# Altium PCB FPv1.3.2.PcbDoc (part 9 of 9)
Units mm, origin at the board's own origin, x right, y up, seen from the top; angles counter-clockwise.
Board outline 81.28 x 53.34 mm, 4 copper layers (Top Layer, GROUND PLANE, POWER PLANE, Bottom Layer); 98 components, 183 nets, 614 pads, 312 vias.
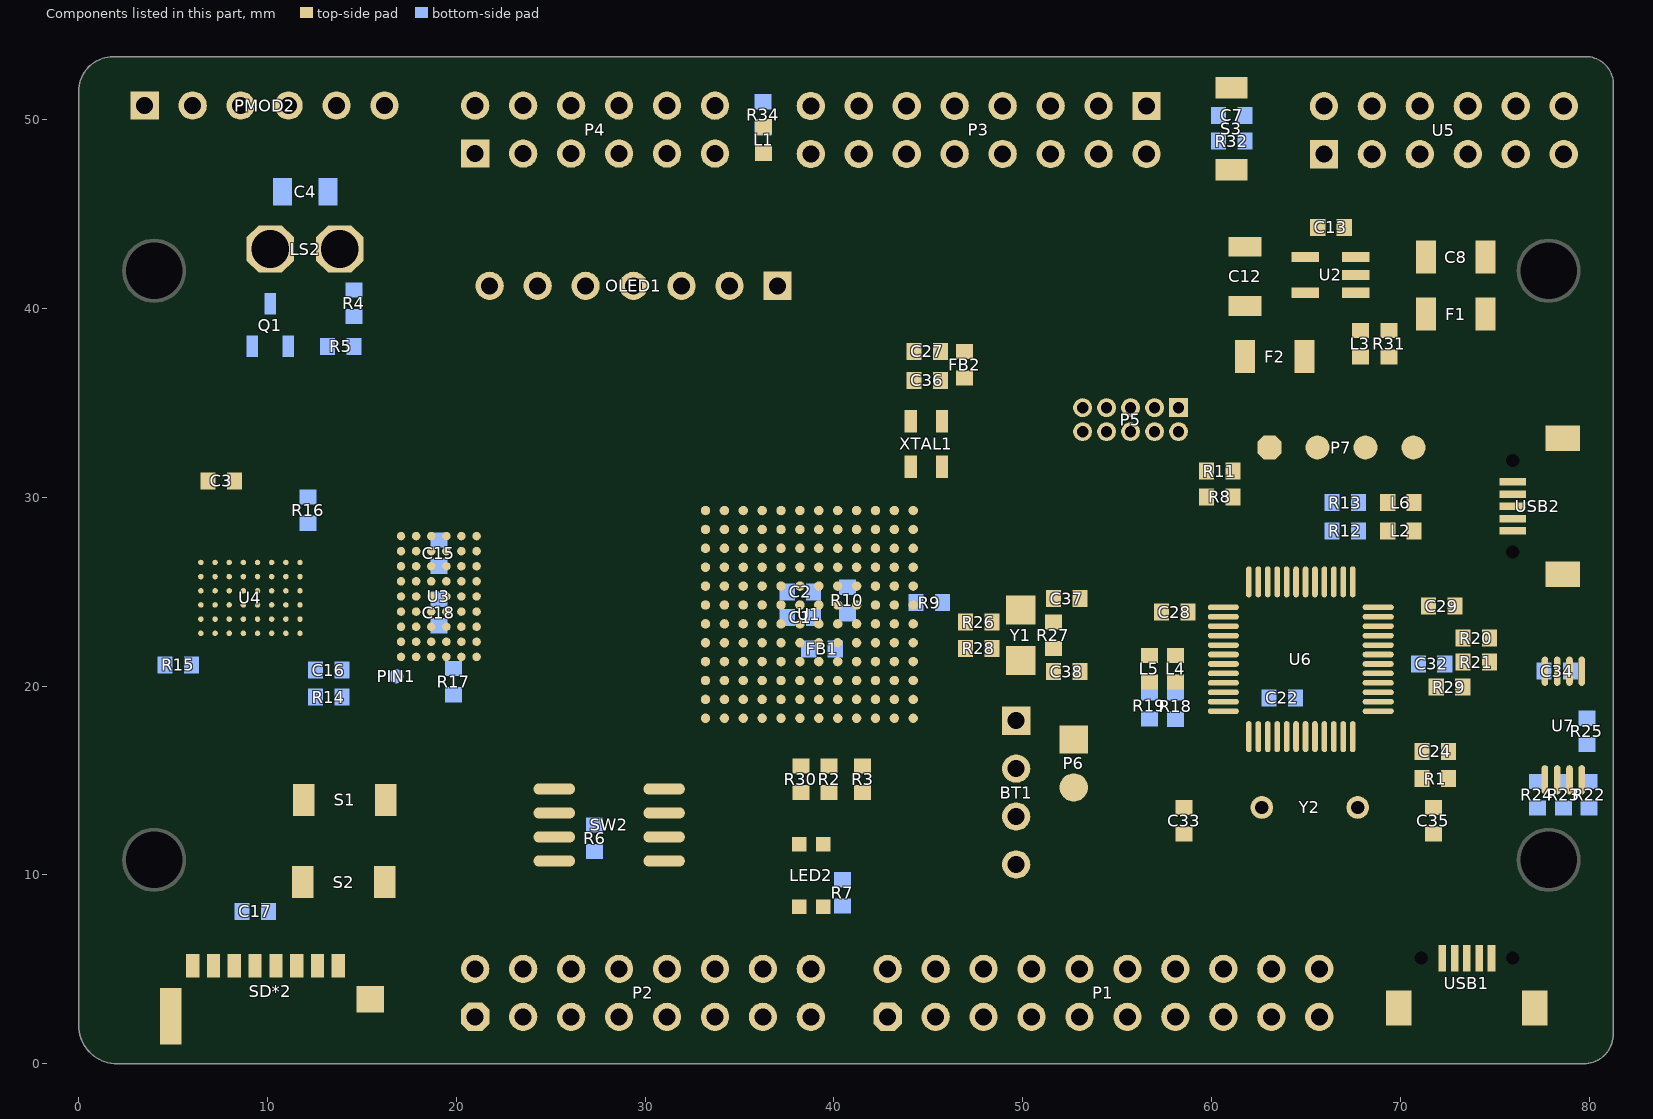
[diagram p11: the components of this part, seen from the top]

## Via types
v1: diameter 0.403, hole 0.2, Top Layer to Bottom Layer, tented both sides, 261 vias
v2: diameter 0.503, hole 0.3, Top Layer to Bottom Layer, tented both sides, 25 vias
v3: diameter 0.6, hole 0.4, Top Layer to Bottom Layer, tented both sides, 11 vias
v4: diameter 0.508, hole 0.33, Top Layer to Bottom Layer, tented both sides, 5 vias
v5: diameter 0.703, hole 0.4, Top Layer to Bottom Layer, tented both sides, 3 vias
v6: diameter 0.603, hole 0.4, Top Layer to Bottom Layer, tented both sides, 2 vias
v7: diameter 0.503, hole 0.25, Top Layer to Bottom Layer, tented both sides, 2 vias
v8: diameter 0.6, hole 0.24, Top Layer to Bottom Layer, tented both sides, 1 vias
v9: diameter 0.508, hole 0.349, Top Layer to Bottom Layer, tented both sides, 1 vias
v10: diameter 0.603, hole 0.3, Top Layer to Bottom Layer, tented both sides, 1 vias

## Nets (pads, with @x,y where several pads share a name; then routed paths per layer and width w, separated by ;. In a path a pad name is that pad's centre, name@x,y a point inside that pad or via, vN(x,y) a via of type N, cw(c..) or ccw(c..) an arc to the next point about the centre after c; other vN are vias at no path point) (continued)
copper on no net: (continued)
  Top Layer w0.025: 57.963,38.405 58.496,38.405 ; 57.963,38.43 58.522,38.43 ; 57.963,43.51 57.988,43.51 ; 57.963,43.637 58.09,43.637 ; 57.988,36.754 58.115,36.754 ; 57.988,37.516 58.09,37.516 ; 57.988,38.456 58.09,38.456 ; 57.988,43.205 58.064,43.205 ; 58.014,38.481 58.064,38.481 ; 58.014,43.612 58.115,43.612 ; 58.039,36.779 58.141,36.779 ; 58.039,37.541 58.166,37.541 ; 58.064,37.567 58.166,37.567 ; 58.064,43.586 58.166,43.586 ; 58.09,36.805 58.191,36.805 ; 58.115,37.516 58.191,37.516 ; 58.115,37.592 58.191,37.592 ; 58.115,38.456 58.547,38.456 ; 58.115,43.561 58.217,43.561 ; 58.141,36.83 58.242,36.83 ; 58.141,37.465 58.217,37.465 ; 58.141,37.49 58.191,37.49 ; 58.141,37.617 58.242,37.617 ; 58.141,38.481 58.572,38.481 ; 58.166,37.44 58.242,37.44 ; 58.166,37.643 58.268,37.643 ; 58.166,38.506 58.572,38.506 ; 58.166,38.532 58.598,38.532 ; 58.166,43.536 58.268,43.536 ; 58.191,36.855 58.268,36.855 ; 58.191,37.389 58.268,37.389 ; 58.191,37.414 58.242,37.414 ; 58.191,38.557 58.623,38.557 ; 58.191,38.583 58.623,38.583 ; 58.191,43.51 58.293,43.51 ; 58.217,36.881 58.318,36.881 ; 58.217,37.363 58.293,37.363 ; 58.217,37.668 58.268,37.668 ; 58.217,38.608 58.649,38.608 ; 58.217,38.633 58.674,38.633 ; 58.242,37.313 58.318,37.313 ; 58.242,37.338 58.293,37.338 ; 58.242,38.659 58.674,38.659 ; 58.242,38.684 58.699,38.684 ; 58.242,43.485 58.344,43.485 ; 58.268,36.906 58.369,36.906 ; 58.268,37.287 58.344,37.287 ; 58.268,38.71 58.369,38.71 ; 58.268,38.735 58.369,38.735 ; 58.293,37.236 58.369,37.236 ; 58.293,37.262 58.344,37.262 ; 58.293,37.744 58.395,37.744 ; 58.293,38.76 58.395,38.76 ; 58.293,38.786 58.395,38.786 ; 58.293,43.459 58.369,43.459 ; 58.318,36.932 58.395,36.932 ; 58.318,37.211 58.369,37.211 ; 58.318,37.719 58.395,37.719 ; 58.318,37.77 58.395,37.77 ; 58.318,38.811 58.395,38.811 ; 58.318,38.837 58.395,38.837 ; 58.318,38.862 58.395,38.862 ; 58.318,42.291 58.496,42.291 ; 58.318,42.316 58.369,42.316 ; 58.318,42.342 58.344,42.342 ; 58.318,43.434 58.42,43.434 ; 58.344,36.957 58.445,36.957 ; 58.344,37.694 58.42,37.694 ; 58.344,37.795 58.42,37.795 ; 58.344,38.887 58.395,38.887 ; 58.344,38.913 58.395,38.913 ; 58.344,42.215 58.395,42.215 ; 58.344,42.24 58.445,42.24 ; 58.344,42.266 58.471,42.266 ; 58.344,42.545 58.471,42.545 ; 58.344,42.57 58.445,42.57 ; 58.369,37.668 58.445,37.668 ; 58.369,38.938 58.395,38.938 ; 58.369,38.964 58.395,38.964 ; 58.369,38.989 58.395,38.989 ; 58.369,42.494 58.572,42.494 ; 58.369,42.52 58.522,42.52 ; 58.369,42.596 58.395,42.596 ; 58.369,43.409 58.445,43.409 ; 58.395,36.982 58.471,36.982 ; 58.395,37.643 58.471,37.643 ; 58.395,37.821 58.471,37.821 ; 58.395,43.383 58.496,43.383 ; 58.42,37.008 58.522,37.008 ; 58.42,37.617 58.522,37.617 ; 58.42,37.846 58.496,37.846 ; 58.42,38.71 58.725,38.71 ; 58.445,37.592 58.522,37.592 ; 58.445,37.871 58.522,37.871 ; 58.445,38.735 58.725,38.735 ; 58.445,42.316 58.547,42.316 ; 58.445,42.469 58.623,42.469 ; 58.445,43.358 58.522,43.358 ; 58.471,37.033 58.547,37.033 ; 58.471,37.567 58.547,37.567 ; 58.471,37.897 58.547,37.897 ; 58.471,38.76 58.75,38.76 ; 58.471,38.786 58.75,38.786 ; 58.471,43.332 58.572,43.332 ; 58.496,37.059 58.572,37.059 ; 58.496,37.516 58.572,37.516 ; 58.496,37.541 58.572,37.541 ; 58.496,37.643 58.572,37.643 ; 58.496,37.922 58.572,37.922 ; 58.496,38.811 58.776,38.811 ; 58.496,41.3 58.903,41.3 ; 58.496,42.342 58.598,42.342 ; 58.522,37.084 58.623,37.084 ; 58.522,37.49 58.598,37.49 ; 58.522,37.668 58.598,37.668 ; 58.522,37.948 58.572,37.948 ; 58.522,38.837 58.776,38.837 ; 58.522,43.307 58.598,43.307 ; 58.547,37.465 58.699,37.465 ; 58.547,37.694 58.623,37.694 ; 58.547,38.862 58.801,38.862 ; 58.547,38.887 58.801,38.887 ; 58.547,42.367 58.623,42.367 ; 58.547,42.443 58.649,42.443 ; 58.547,43.282 58.623,43.282 ; 58.572,37.109 58.649,37.109 ; 58.572,37.44 58.649,37.44 ; 58.572,37.719 58.649,37.719 ; 58.572,38.913 58.826,38.913 ; 58.572,41.275 58.903,41.275 ; 58.572,42.393 58.776,42.393 ; 58.572,43.256 58.674,43.256 ; 58.598,37.135 58.674,37.135 ; 58.598,37.414 58.623,37.414 ; 58.598,37.744 58.674,37.744 ; 58.598,38.938 58.826,38.938 ; 58.598,38.964 58.852,38.964 ; 58.598,42.418 58.877,42.418 ; 58.623,37.16 58.699,37.16 ; 58.623,37.77 58.699,37.77 ; 58.623,38.989 58.852,38.989 ; 58.623,41.25 58.928,41.25 ; 58.623,43.231 58.699,43.231 ; 58.649,37.49 58.725,37.49 ; 58.649,37.795 58.674,37.795 ; 58.649,37.973 58.725,37.973 ; 58.649,37.998 58.699,37.998 ; 58.649,38.024 58.699,38.024 ; 58.649,38.049 58.699,38.049 ; 58.649,38.075 58.699,38.075 ; 58.649,38.1 58.699,38.1 ; 58.649,38.125 58.725,38.125 ; 58.649,39.014 58.877,39.014 ; 58.649,39.04 58.877,39.04 ; 58.649,42.316 58.75,42.316 ; 58.649,42.545 58.725,42.545 ; 58.649,42.57 58.674,42.57 ; 58.649,43.205 58.725,43.205 ; 58.674,37.186 58.75,37.186 ; 58.674,37.516 58.75,37.516 ; 58.674,37.922 58.75,37.922 ; 58.674,37.948 58.725,37.948 ; 58.674,38.151 58.725,38.151 ; 58.674,39.065 58.903,39.065 ; 58.674,39.091 58.903,39.091 ; 58.674,41.224 58.928,41.224 ; 58.674,42.291 58.75,42.291 ; 58.674,42.342 58.75,42.342 ; 58.674,42.52 58.776,42.52 ; 58.674,43.18 58.75,43.18 ; 58.699,37.211 58.776,37.211 ; 58.699,37.541 58.776,37.541 ; 58.699,37.897 58.776,37.897 ; 58.699,38.176 58.75,38.176 ; 58.699,39.116 58.928,39.116 ; 58.699,39.141 58.928,39.141 ; 58.699,41.199 58.928,41.199 ; 58.699,42.367 58.75,42.367 ; 58.699,42.647 58.725,42.647 ; 58.699,43.155 58.776,43.155 ; 58.725,37.236 58.801,37.236 ; 58.725,37.567 58.801,37.567 ; 58.725,37.871 58.801,37.871 ; 58.725,38.202 58.801,38.202 ; 58.725,39.167 58.928,39.167 ; 58.725,39.192 58.953,39.192 ; 58.725,41.173 58.953,41.173 ; 58.725,42.672 58.877,42.672 ; 58.725,42.697 58.877,42.697 ; 58.75,37.262 58.826,37.262 ; 58.75,37.592 58.826,37.592 ; 58.75,37.846 58.852,37.846 ; 58.75,38.227 58.928,38.227 ; 58.75,39.218 58.953,39.218 ; 58.75,39.243 58.953,39.243 ; 58.75,39.268 58.979,39.268 ; 58.75,41.148 58.953,41.148 ; 58.75,42.494 58.801,42.494 ; 58.75,42.596 58.801,42.596 ; 58.75,42.647 58.852,42.647 ; 58.75,42.723 58.903,42.723 ; 58.75,42.748 58.826,42.748 ; 58.75,43.129 58.826,43.129 ; 58.776,37.287 58.852,37.287 ; 58.776,37.617 58.852,37.617 ; 58.776,37.821 59.004,37.821 ; 58.776,39.294 58.979,39.294 ; 58.776,39.319 58.979,39.319 ; 58.776,41.123 58.953,41.123 ; 58.776,42.443 58.903,42.443 ; 58.776,42.469 58.852,42.469 ; 58.776,42.621 58.801,42.621 ; 58.776,42.774 58.852,42.774 ; 58.776,43.104 58.852,43.104 ; 58.801,37.643 58.852,37.643 ; 58.801,38.252 58.877,38.252 ; 58.801,39.345 59.004,39.345 ; 58.801,39.37 59.004,39.37 ; 58.801,39.395 59.004,39.395 ; 58.801,41.097 58.979,41.097 ; 58.801,42.393 58.877,42.393 ; 58.801,42.799 58.852,42.799 ; 58.801,43.078 58.877,43.078 ; 58.826,37.313 58.903,37.313 ; 58.826,39.421 59.03,39.421 ; 58.826,39.446 59.03,39.446 ; 58.826,39.472 59.03,39.472 ; 58.826,41.072 58.979,41.072 ; 58.826,42.545 58.877,42.545 ; 58.826,42.57 58.877,42.57 ; 58.826,43.053 58.903,43.053 ; 58.852,37.338 58.928,37.338 ; 58.852,37.795 58.953,37.795 ; 58.852,38.202 58.928,38.202 ; 58.852,39.497 59.03,39.497 ; 58.852,39.522 59.055,39.522 ; 58.852,39.548 59.055,39.548 ; 58.852,41.021 59.004,41.021 ; 58.852,41.046 59.004,41.046 ; 58.852,42.52 58.903,42.52 ; 58.852,42.596 59.055,42.596 ; 58.852,43.028 58.928,43.028 ; 58.877,37.363 58.953,37.363 ; 58.877,39.573 59.055,39.573 ; 58.877,39.599 59.055,39.599 ; 58.877,39.624 59.08,39.624 ; 58.877,39.649 59.08,39.649 ; 58.877,40.97 59.004,40.97 ; 58.877,40.996 59.004,40.996 ; 58.877,42.621 59.08,42.621 ; 58.877,42.748 58.903,42.748 ; 58.877,42.774 58.928,42.774 ; 58.877,43.002 58.953,43.002 ; 58.903,37.389 58.979,37.389 ; 58.903,38.354 59.004,38.354 ; 58.903,38.379 58.953,38.379 ; 58.903,39.675 59.08,39.675 ; 58.903,39.7 59.08,39.7 ; 58.903,39.726 59.08,39.726 ; 58.903,39.751 59.08,39.751 ; 58.903,40.894 59.03,40.894 ; 58.903,40.919 59.03,40.919 ; 58.903,40.945 59.03,40.945 ; 58.903,42.545 58.953,42.545 ; 58.903,42.647 59.106,42.647 ; 58.903,42.672 59.106,42.672 ; 58.903,42.799 58.928,42.799 ; 58.903,42.824 58.928,42.824 ; 58.903,42.85 58.928,42.85 ; 58.903,42.977 58.979,42.977 ; 58.928,37.414 59.004,37.414 ; 58.928,38.329 59.055,38.329 ; 58.928,39.776 59.106,39.776 ; 58.928,39.802 59.106,39.802 ; 58.928,39.827 59.106,39.827 ; 58.928,39.853 59.106,39.853 ; 58.928,39.878 59.106,39.878 ; 58.928,39.903 59.106,39.903 ; 58.928,40.818 59.055,40.818 ; 58.928,40.843 59.055,40.843 ; 58.928,40.869 59.055,40.869 ; 58.928,42.57 59.055,42.57 ; 58.928,42.951 59.004,42.951 ; 58.953,37.44 59.03,37.44 ; 58.953,37.846 59.03,37.846 ; 58.953,39.929 59.106,39.929 ; 58.953,39.954 59.106,39.954 ; 58.953,39.98 59.106,39.98 ; 58.953,40.005 59.106,40.005 ; 58.953,40.03 59.131,40.03 ; 58.953,40.056 59.131,40.056 ; 58.953,40.081 59.131,40.081 ; 58.953,40.107 59.131,40.107 ; 58.953,40.691 59.08,40.691 ; 58.953,40.716 59.08,40.716 ; 58.953,40.742 59.08,40.742 ; 58.953,40.767 59.055,40.767 ; 58.953,40.792 59.055,40.792 ; 58.953,42.443 59.131,42.443 ; 58.953,42.469 59.157,42.469 ; 58.953,42.697 59.004,42.697 ; 58.953,42.723 59.004,42.723 ; 58.953,42.748 59.004,42.748 ; 58.953,42.926 59.03,42.926 ; 58.979,37.465 59.055,37.465 ; 58.979,38.303 59.157,38.303 ; 58.979,40.132 59.131,40.132 ; 58.979,40.157 59.131,40.157 ; 58.979,40.183 59.131,40.183 ; 58.979,40.208 59.131,40.208 ; 58.979,40.234 59.131,40.234 ; 58.979,40.259 59.131,40.259 ; 58.979,40.284 59.131,40.284 ; 58.979,40.31 59.131,40.31 ; 58.979,40.335 59.131,40.335 ; 58.979,40.361 59.106,40.361 ; 58.979,40.386 59.106,40.386 ; 58.979,40.411 59.106,40.411 ; 58.979,40.437 59.106,40.437 ; 58.979,40.462 59.106,40.462 ; 58.979,40.488 59.106,40.488 ; 58.979,40.513 59.106,40.513 ; 58.979,40.538 59.106,40.538 ; 58.979,40.564 59.106,40.564 ; 58.979,40.589 59.106,40.589 ; 58.979,40.615 59.08,40.615 ; 58.979,40.64 59.08,40.64 ; 58.979,40.665 59.08,40.665 ; 58.979,42.901 59.055,42.901 ; 59.004,37.49 59.08,37.49 ; 59.004,37.871 59.055,37.871 ; 59.004,42.875 59.08,42.875 ; 59.03,37.516 59.106,37.516 ; 59.03,37.897 59.08,37.897 ; 59.03,37.922 59.106,37.922 ; 59.03,38.049 59.106,38.049 ; 59.03,38.278 59.157,38.278 ; 59.03,42.418 59.106,42.418 ; 59.03,42.494 59.157,42.494 ; 59.03,42.85 59.106,42.85 ; 59.055,37.541 59.131,37.541 ; 59.055,37.948 59.106,37.948 ; 59.055,37.973 59.106,37.973 ; 59.055,37.998 59.106,37.998 ; 59.055,38.024 59.106,38.024 ; 59.055,38.075 59.08,38.075 ; 59.055,38.633 59.131,38.633 ; 59.055,42.52 59.157,42.52 ; 59.055,42.545 59.131,42.545 ; 59.055,42.824 59.131,42.824 ; 59.08,37.567 59.131,37.567 ; 59.08,38.252 59.182,38.252 ; 59.08,38.608 59.182,38.608 ; 59.08,38.659 59.106,38.659 ; 59.08,42.799 59.157,42.799 ; 59.106,37.592 59.157,37.592 ; 59.106,38.227 59.233,38.227 ; 59.106,38.329 59.157,38.329 ; 59.106,38.583 59.233,38.583 ; 59.106,42.774 59.182,42.774 ; 59.131,37.617 59.182,37.617 ; 59.131,37.643 59.207,37.643 ; 59.131,38.354 59.182,38.354 ; 59.131,38.379 59.182,38.379 ; 59.131,42.748 59.207,42.748 ; 59.157,37.668 59.233,37.668 ; 59.157,38.202 59.284,38.202 ; 59.157,38.405 59.207,38.405 ; 59.157,38.43 59.233,38.43 ; 59.157,38.557 59.284,38.557 ; 59.157,38.811 59.284,38.811 ; 59.157,38.837 59.284,38.837 ; 59.157,38.862 59.512,38.862 ; 59.157,42.723 59.207,42.723 ; 59.182,37.694 59.258,37.694 ; 59.182,38.456 59.233,38.456 ; 59.182,38.481 59.258,38.481 ; 59.182,42.697 59.233,42.697 ; 59.207,37.719 59.284,37.719 ; 59.207,38.176 59.334,38.176 ; 59.207,38.506 59.36,38.506 ; 59.207,38.532 59.309,38.532 ; 59.207,38.786 59.334,38.786 ; 59.207,42.647 59.284,42.647 ; 59.207,42.672 59.258,42.672 ; 59.233,37.744 59.284,37.744 ; 59.233,42.621 59.309,42.621 ; 59.258,37.77 59.309,37.77 ; 59.258,37.795 59.334,37.795 ; 59.258,38.151 59.334,38.151 ; 59.258,38.76 59.385,38.76 ; 59.258,38.887 59.69,38.887 ; 59.258,42.596 59.334,42.596 ; 59.284,37.821 59.36,37.821 ; 59.284,38.481 59.411,38.481 ; 59.284,39.116 59.385,39.116 ; 59.284,42.57 59.334,42.57 ; 59.309,37.846 59.385,37.846 ; 59.309,38.735 59.436,38.735 ; 59.309,39.091 59.436,39.091 ; 59.309,39.141 59.334,39.141 ; 59.309,41.224 59.385,41.224 ; 59.309,41.25 59.334,41.25 ; 59.309,42.52 59.385,42.52 ; 59.309,42.545 59.36,42.545 ; 59.334,37.871 59.385,37.871 ; 59.334,37.897 59.411,37.897 ; 59.334,38.456 59.461,38.456 ; 59.334,40.869 59.36,40.869 ; 59.334,40.894 59.385,40.894 ; 59.334,40.919 59.436,40.919 ; 59.334,41.199 59.411,41.199 ; 59.334,42.494 59.411,42.494 ; 59.36,37.922 59.436,37.922 ; 59.36,38.71 59.487,38.71 ; 59.36,39.065 59.461,39.065 ; 59.36,39.319 59.411,39.319 ; 59.36,39.345 59.411,39.345 ; 59.36,40.945 59.461,40.945 ; 59.36,41.173 59.461,41.173 ; 59.36,42.469 59.411,42.469 ; 59.385,37.948 59.436,37.948 ; 59.385,38.43 59.487,38.43 ; 59.385,39.218 59.461,39.218 ; 59.385,39.243 59.436,39.243 ; 59.385,39.268 59.436,39.268 ; 59.385,39.294 59.411,39.294 ; 59.385,39.37 59.436,39.37 ; 59.385,39.395 59.436,39.395 ; 59.385,39.421 59.436,39.421 ; 59.385,40.564 59.436,40.564 ; 59.385,40.589 59.436,40.589 ; 59.385,40.615 59.436,40.615 ; 59.385,40.64 59.436,40.64 ; 59.385,40.665 59.436,40.665 ; 59.385,40.691 59.436,40.691 ; 59.385,40.716 59.436,40.716 ; 59.385,42.418 59.461,42.418 ; 59.385,42.443 59.436,42.443 ; 59.411,37.973 59.461,37.973 ; 59.411,37.998 59.487,37.998 ; 59.411,38.684 59.512,38.684 ; 59.411,39.04 59.512,39.04 ; 59.411,39.192 59.487,39.192 ; 59.411,39.446 59.461,39.446 ; 59.411,39.472 59.512,39.472 ; 59.411,39.649 59.868,39.649 ; 59.411,39.675 59.766,39.675 ; 59.411,40.513 59.487,40.513 ; 59.411,40.538 59.461,40.538 ; 59.411,40.742 59.461,40.742 ; 59.411,40.767 59.487,40.767 ; 59.411,40.97 59.512,40.97 ; 59.411,41.148 59.487,41.148 ; 59.411,42.393 59.461,42.393 ; 59.436,38.024 59.512,38.024 ; 59.436,38.405 59.461,38.405 ; 59.436,39.167 59.563,39.167 ; 59.436,39.497 59.766,39.497 ; 59.436,40.107 59.487,40.107 ; 59.436,40.132 59.487,40.132 ; 59.436,40.157 59.487,40.157 ; 59.436,40.183 59.487,40.183 ; 59.436,40.488 59.538,40.488 ; 59.436,40.792 59.538,40.792 ; 59.436,40.996 59.538,40.996 ; 59.436,41.123 59.538,41.123 ; 59.436,42.342 59.512,42.342 ; 59.436,42.367 59.487,42.367 ; 59.461,38.049 59.512,38.049 ; 59.461,38.075 59.538,38.075 ; 59.461,38.659 59.563,38.659 ; 59.461,39.014 59.563,39.014 ; 59.461,39.141 59.766,39.141 ; 59.461,40.03 59.538,40.03 ; 59.461,40.056 59.512,40.056 ; 59.461,40.081 59.487,40.081 ; 59.461,40.208 59.512,40.208 ; 59.461,40.234 59.538,40.234 ; 59.461,40.462 59.792,40.462 ; 59.461,40.818 59.512,40.818 ; 59.461,42.316 59.538,42.316 ; 59.487,38.1 59.538,38.1 ; 59.487,39.522 59.715,39.522 ; 59.487,40.005 59.563,40.005 ; 59.487,40.259 59.563,40.259 ; 59.487,40.284 59.588,40.284 ; 59.487,41.021 59.588,41.021 ; 59.487,41.097 59.588,41.097 ; 59.487,42.266 59.563,42.266 ; 59.487,42.291 59.538,42.291 ; 59.512,38.125 59.563,38.125 ; 59.512,38.151 59.588,38.151 ; 59.512,38.633 59.563,38.633 ; 59.512,38.913 59.715,38.913 ; 59.512,38.989 59.614,38.989 ; 59.512,39.98 59.614,39.98 ; 59.512,40.437 59.741,40.437 ; 59.512,41.046 59.792,41.046 ; 59.512,42.24 59.563,42.24 ; 59.538,38.176 59.588,38.176 ; 59.538,38.964 59.665,38.964 ; 59.538,39.116 59.715,39.116 ; 59.538,39.954 59.817,39.954 ; 59.538,40.31 59.842,40.31 ; 59.538,41.072 59.792,41.072 ; 59.538,42.189 59.614,42.189 ; 59.538,42.215 59.588,42.215 ; 59.563,38.202 59.614,38.202 ; 59.563,38.227 59.639,38.227 ; 59.563,40.335 59.817,40.335 ; 59.563,42.139 59.639,42.139 ; 59.563,42.164 59.614,42.164 ; 59.588,38.252 59.639,38.252 ; 59.588,38.278 59.665,38.278 ; 59.588,38.938 59.715,38.938 ; 59.588,39.929 59.766,39.929 ; 59.588,42.113 59.639,42.113 ; 59.614,38.303 59.665,38.303 ; 59.614,38.329 59.69,38.329 ; 59.614,40.665 59.665,40.665 ; 59.614,40.691 59.665,40.691 ; 59.614,40.716 59.665,40.716 ; 59.614,40.742 59.665,40.742 ; 59.614,40.767 59.665,40.767 ; 59.614,40.792 59.817,40.792 ; 59.614,40.818 59.817,40.818 ; 59.614,42.062 59.665,42.062 ; 59.614,42.088 59.665,42.088 ; 59.639,38.354 59.69,38.354 ; 59.639,42.012 59.715,42.012 ; 59.639,42.037 59.69,42.037 ; 59.665,38.379 59.715,38.379 ; 59.665,38.405 59.715,38.405 ; 59.665,41.961 59.741,41.961 ; 59.665,41.986 59.715,41.986 ; 59.69,38.43 59.741,38.43 ; 59.69,38.456 59.741,38.456 ; 59.69,39.472 59.792,39.472 ; 59.69,39.624 59.868,39.624 ; 59.69,41.91 59.766,41.91 ; 59.69,41.935 59.741,41.935 ; 59.715,38.481 59.766,38.481 ; 59.715,38.506 59.766,38.506 ; 59.715,39.167 59.792,39.167 ; 59.715,40.488 59.817,40.488 ; 59.715,41.859 59.792,41.859 ; 59.715,41.885 59.766,41.885 ; 59.741,38.532 59.792,38.532 ; 59.741,38.557 59.792,38.557 ; 59.741,39.192 59.817,39.192 ; 59.741,39.446 59.817,39.446 ; 59.741,39.98 59.868,39.98 ; 59.741,41.808 59.792,41.808 ; 59.741,41.834 59.792,41.834 ; 59.766,38.583 59.817,38.583 ; 59.766,38.608 59.817,38.608 ; 59.766,38.633 59.842,38.633 ; 59.766,39.218 59.817,39.218 ; 59.766,39.421 59.817,39.421 ; 59.766,40.513 59.817,40.513 ; 59.766,40.538 59.842,40.538 ; 59.766,40.767 59.842,40.767 ; 59.766,41.758 59.817,41.758 ; 59.766,41.783 59.817,41.783 ; 59.792,38.659 59.842,38.659 ; 59.792,38.684 59.842,38.684 ; 59.792,39.243 59.842,39.243 ; 59.792,39.268 59.842,39.268 ; 59.792,39.345 59.842,39.345 ; 59.792,39.37 59.842,39.37 ; 59.792,39.395 59.842,39.395 ; 59.792,40.284 59.868,40.284 ; 59.792,40.564 59.842,40.564 ; 59.792,40.716 59.842,40.716 ; 59.792,40.742 59.842,40.742 ; 59.792,41.707 59.842,41.707 ; 59.792,41.732 59.842,41.732 ; 59.817,38.71 59.868,38.71 ; 59.817,38.735 59.868,38.735 ; 59.817,39.294 59.842,39.294 ; 59.817,39.319 59.842,39.319 ; 59.817,39.675 59.868,39.675 ; 59.817,39.7 59.868,39.7 ; 59.817,39.726 59.868,39.726 ; 59.817,39.751 59.868,39.751 ; 59.817,39.776 59.868,39.776 ; 59.817,39.802 59.868,39.802 ; 59.817,39.827 59.868,39.827 ; 59.817,39.853 59.868,39.853 ; 59.817,39.878 59.868,39.878 ; 59.817,40.005 59.893,40.005 ; 59.817,40.259 59.893,40.259 ; 59.817,40.589 59.868,40.589 ; 59.817,40.615 59.868,40.615 ; 59.817,40.64 59.868,40.64 ; 59.817,40.665 59.868,40.665 ; 59.817,40.691 59.868,40.691 ; 59.817,41.631 59.868,41.631 ; 59.817,41.656 59.868,41.656 ; 59.817,41.681 59.868,41.681 ; 59.842,38.76 59.893,38.76 ; 59.842,38.786 59.893,38.786 ; 59.842,38.811 59.893,38.811 ; 59.842,39.903 59.868,39.903 ; 59.842,40.03 59.893,40.03 ; 59.842,40.056 59.919,40.056 ; 59.842,40.234 59.893,40.234 ; 59.842,41.58 59.893,41.58 ; 59.842,41.605 59.893,41.605 ; 59.868,38.837 59.919,38.837 ; 59.868,38.862 59.919,38.862 ; 59.868,38.887 59.944,38.887 ; 59.868,40.081 59.919,40.081 ; 59.868,40.107 59.919,40.107 ; 59.868,40.132 59.919,40.132 ; 59.868,40.157 59.919,40.157 ; 59.868,40.183 59.919,40.183 ; 59.868,40.208 59.919,40.208 ; 59.868,41.504 59.919,41.504 ; 59.868,41.529 59.919,41.529 ; 59.868,41.554 59.919,41.554 ; 59.893,38.913 59.944,38.913 ; 59.893,38.938 59.944,38.938 ; 59.893,41.427 59.944,41.427 ; 59.893,41.453 59.944,41.453 ; 59.893,41.478 59.944,41.478 ; 59.919,38.964 59.969,38.964 ; 59.919,38.989 59.969,38.989 ; 59.919,39.014 59.969,39.014 ; 59.919,41.351 59.969,41.351 ; 59.919,41.377 59.969,41.377 ; 59.919,41.402 59.969,41.402 ; 59.944,39.04 59.995,39.04 ; 59.944,39.065 59.995,39.065 ; 59.944,39.091 59.995,39.091 ; 59.944,39.116 59.995,39.116 ; 59.944,41.275 59.995,41.275 ; 59.944,41.3 59.995,41.3 ; 59.944,41.326 59.995,41.326 ; 59.969,39.141 60.02,39.141 ; 59.969,39.167 60.02,39.167 ; 59.969,39.192 60.02,39.192 ; 59.969,41.173 60.02,41.173 ; 59.969,41.199 60.02,41.199 ; 59.969,41.224 60.02,41.224 ; 59.969,41.25 60.02,41.25 ; 59.995,39.218 60.046,39.218 ; 59.995,39.243 60.046,39.243 ; 59.995,39.268 60.046,39.268 ; 59.995,39.294 60.046,39.294 ; 59.995,41.072 60.046,41.072 ; 59.995,41.097 60.046,41.097 ; 59.995,41.123 60.046,41.123 ; 59.995,41.148 60.046,41.148 ; 60.02,39.319 60.046,39.319 ; 60.02,39.345 60.071,39.345 ; 60.02,39.37 60.071,39.37 ; 60.02,39.395 60.071,39.395 ; 60.02,39.421 60.071,39.421 ; 60.02,40.97 60.071,40.97 ; 60.02,40.996 60.071,40.996 ; 60.02,41.021 60.071,41.021 ; 60.02,41.046 60.071,41.046 ; 60.046,39.446 60.071,39.446 ; 60.046,39.472 60.096,39.472 ; 60.046,39.497 60.096,39.497 ; 60.046,39.522 60.096,39.522 ; 60.046,39.548 60.096,39.548 ; 60.046,40.818 60.096,40.818 ; 60.046,40.843 60.096,40.843 ; 60.046,40.869 60.096,40.869 ; 60.046,40.894 60.096,40.894 ; 60.046,40.919 60.096,40.919 ; 60.046,40.945 60.071,40.945 ; 60.071,39.573 60.096,39.573 ; 60.071,39.599 60.122,39.599 ; 60.071,39.624 60.122,39.624 ; 60.071,39.649 60.122,39.649 ; 60.071,39.675 60.122,39.675 ; 60.071,39.7 60.122,39.7 ; 60.071,39.726 60.122,39.726 ; 60.071,39.751 60.122,39.751 ; 60.071,40.615 60.122,40.615 ; 60.071,40.64 60.122,40.64 ; 60.071,40.665 60.122,40.665 ; 60.071,40.691 60.122,40.691 ; 60.071,40.716 60.122,40.716 ; 60.071,40.742 60.122,40.742 ; 60.071,40.767 60.122,40.767 ; 60.071,40.792 60.096,40.792 ; 60.096,39.776 60.122,39.776 ; 60.096,39.802 60.147,39.802 ; 60.096,39.827 60.147,39.827 ; 60.096,39.853 60.147,39.853 ; 60.096,39.878 60.147,39.878 ; 60.096,39.903 60.147,39.903 ; 60.096,39.929 60.147,39.929 ; 60.096,39.954 60.147,39.954 ; 60.096,39.98 60.147,39.98 ; 60.096,40.005 60.147,40.005 ; 60.096,40.03 60.147,40.03 ; 60.096,40.056 60.147,40.056 ; 60.096,40.081 60.147,40.081 ; 60.096,40.107 60.147,40.107 ; 60.096,40.132 60.147,40.132 ; 60.096,40.157 60.147,40.157 ; 60.096,40.183 60.147,40.183 ; 60.096,40.208 60.147,40.208 ; 60.096,40.234 60.147,40.234 ; 60.096,40.259 60.147,40.259 ; 60.096,40.284 60.147,40.284 ; 60.096,40.31 60.147,40.31 ; 60.096,40.335 60.147,40.335 ; 60.096,40.361 60.147,40.361 ; 60.096,40.386 60.147,40.386 ; 60.096,40.411 60.147,40.411 ; 60.096,40.437 60.147,40.437 ; 60.096,40.462 60.147,40.462 ; 60.096,40.488 60.147,40.488 ; 60.096,40.513 60.147,40.513 ; 60.096,40.538 60.147,40.538 ; 60.096,40.564 60.147,40.564 ; 60.096,40.589 60.122,40.589

## Polygon pours and split planes (outlines as drawn)
GND on GROUND PLANE (split plane): 1.84,52.83 79.81,52.83 79.822,52.831 79.936,52.823 80.059,52.799 80.178,52.758 80.291,52.703 80.395,52.633 80.49,52.55 80.573,52.455 80.643,52.351 80.698,52.238 80.739,52.119 80.763,51.996 80.771,51.882 80.77,51.87 80.77,1.58 80.771,1.567 80.763,1.44 80.735,1.303 80.69,1.17 80.628,1.044 80.55,0.928 80.458,0.822 80.352,0.73 80.236,0.652 80.11,0.59 79.977,0.545 79.84,0.517 79.713,0.509 79.7,0.51 2.05,0.51 2.035,0.509 1.877,0.518 1.707,0.547 1.541,0.595 1.381,0.661 1.23,0.744 1.089,0.845 0.96,0.96 0.845,1.089 0.744,1.23 0.661,1.381 0.595,1.541 0.547,1.707 0.518,1.877 0.509,2.035 0.51,2.05 0.51,51.5 0.509,51.513 0.517,51.649 0.542,51.796 0.583,51.94 0.64,52.078 0.713,52.208 0.799,52.33 0.898,52.442 1.01,52.541 1.132,52.627 1.262,52.7 1.4,52.757 1.544,52.798 1.691,52.823 1.827,52.831
3.3V on POWER PLANE (split plane): 1.84,52.83 79.81,52.83 79.822,52.831 79.936,52.823 80.059,52.799 80.178,52.758 80.291,52.703 80.395,52.633 80.49,52.55 80.573,52.455 80.643,52.351 80.698,52.238 80.739,52.119 80.763,51.996 80.771,51.882 80.77,51.87 80.77,1.58 80.771,1.567 80.763,1.44 80.735,1.303 80.69,1.17 80.628,1.044 80.55,0.928 80.458,0.822 80.352,0.73 80.236,0.652 80.11,0.59 79.977,0.545 79.84,0.517 79.713,0.509 79.7,0.51 2.05,0.51 2.035,0.509 1.877,0.518 1.707,0.547 1.541,0.595 1.381,0.661 1.23,0.744 1.089,0.845 0.96,0.96 0.845,1.089 0.744,1.23 0.661,1.381 0.595,1.541 0.547,1.707 0.518,1.877 0.509,2.035 0.51,2.05 0.51,51.5 0.509,51.513 0.517,51.649 0.542,51.796 0.583,51.94 0.64,52.078 0.713,52.208 0.799,52.33 0.898,52.442 1.01,52.541 1.132,52.627 1.262,52.7 1.4,52.757 1.544,52.798 1.691,52.823 1.827,52.831

## Keep-outs
Keep-Out Layer:
  the board outline again, w0.254

## Other copper
Top Layer:
  rectangle net 3.3V: 60.884,36.576 62.636,40.615
  rectangle net 3.3V: 37.2,22.306 37.7,25.3
  rectangle net 3.3V: 37.2,25.07 37.97,25.3
  rectangle net GND: 39.2,24.3 40.2,25.3
  rectangle net GND: 38.21,23.724 40.03,24.841
Bottom Layer:
  rectangle net GND: 38.837,24.8 40.529,25.248
  rectangle net 3.3V: 37.135,21.565 37.922,24.562
  rectangle net 3.3V: 37.135,21.514 38.456,22.428
  rectangle net GND: 38.532,23.647 39.7,24.663

## Silkscreen, mask and mechanical layers (free items; w line width, h text height)
Top Overlay:
  drawing of 565 lines, arcs and shapes, not listed
  text "GND" at 63.2,51.2 h0.51 r90
  text ">" at 36.013,48.838 h0.76 r270
  text "B20" at 2.769,48.209 h1.02
  text "B23" at 5.339,48.209 h1.02
  text "B22" at 7.91,48.209 h1.02
  text "B21" at 10.48,48.209 h1.02
  text "GND" at 13.051,48.213 h1.02
  text "3V3" at 15.621,48.213 h1.02
  text "RST" at 63.2,47.05 h0.51 r90
  text "A13" at 65.253,46.025 h1.02
  text "A12" at 67.828,46.021 h1.02
  text "A11" at 70.404,46.025 h1.02
  text "A5" at 72.98,46.025 h1.02
  text "GND" at 75.555,46.025 h1.02
  text "3V3" at 78.13,46.025 h1.02
  text "B3" at 20.371,45.775 h1.02
  text "B1" at 22.939,45.776 h1.02
  text "A29" at 25.507,45.771 h1.02
  text "A27" at 28.076,45.771 h1.02
  text "A25" at 30.644,45.771 h1.02
  text "A19" at 33.212,45.772 h1.02
  text "VCC" at 38,45.772 h1.02
  text "GND" at 40.641,45.772 h1.02
  text "GND" at 43.283,45.772 h1.02
  text "VCC" at 45.924,45.772 h1.02
  text "3V3" at 48.565,45.772 h1.02
  text "RST" at 51.207,45.772 h1.02
  text "3V3" at 53.848,45.772 h1.02
  text "NC" at 56.49,45.772 h1.02
  text "A14" at 65.253,45.009 h1.02
  text "A17" at 67.828,45.009 h1.02
  text "A16" at 70.404,45.009 h1.02
  text "A15" at 72.98,45.009 h1.02
  text "GND" at 75.555,45.009 h1.02
  text "3V3" at 78.13,45.009 h1.02
  text "B4" at 20.371,44.557 h1.02
  text "B2" at 22.931,44.552 h1.02
  text "B0" at 25.491,44.553 h1.02
  text "A28" at 28.052,44.552 h1.02
  text "A26" at 30.612,44.552 h1.02
  text "A24" at 33.172,44.552 h1.02
  text "A13" at 38.028,44.558 h1.02
  text "A12" at 40.66,44.552 h1.02
  text "A11" at 43.292,44.552 h1.02
  text "A10" at 45.924,44.559 h1.02
  text "A9" at 48.556,44.56 h1.02
  text "A8" at 51.188,44.56 h1.02
  text "A7" at 53.82,44.552 h1.02
  text "A6" at 56.452,44.56 h1.02
  text "+" at 71.4,44.05 h0.51 r90
  text "470P" at 64.618,43.637 h0.51 r90
  text "10uF" at 72.225,42.525 h0.86
  text "2.2uF" at 61.975,40.925 h0.76 r90
  text "+" at 60.25,40.525 h0.51
  text "3.3V" at 64.475,39.775 h0.51
  text "3.3V" at 60.45,39.475 h0.51 r90
  text "F" at 72.825,39.475 h0.86
  text "GND" at 21.26,39.021 h0.86
  text "3V3" at 23.8,39.021 h0.86
  text "B8" at 26.34,39.021 h0.86
  text "B7" at 28.88,39.014 h0.86
  text "B6" at 31.42,39.021 h0.86
  text "B5" at 33.96,39.022 h0.86
  text "GND" at 36.5,39.021 h0.86
  text "105" at 45.2,38.8 h0.51 r180
  text ">" at 67.65,38.3 h0.76 r270
  text "F" at 63.2,37.15 h0.86
  text "FB" at 47.825,36.75 h0.51 r90
  text "3.3V" at 57.75,36.025 h0.76
  text "1K" at 69.037,35.839 h0.86
  text "104" at 45.275,35.4 h0.51 r180
  text "L2" at 62.687,34.315 h0.86
  text "L3" at 65.219,34.32 h0.86
  text "H0" at 67.75,34.32 h0.86
  text "H1" at 70.282,34.315 h0.86
  text "DDK" at 27.686,33.19 h1.27
  text "0R" at 59.995,32.182 h0.86
  text "GND" at 42.625,32.1 h0.51 r270
  text "人民满意，世人仰慕！" at 24.206,31.217 h1.8
  text "L1" at 62.205,30.531 h0.86
  text "104" at 7.2,29.85 h0.51
  text "L0" at 62.23,29.667 h0.86
  text ">" at 69.926,28.677 h0.86
  text "1K" at 59.969,28.499 h0.86
  text "12P" at 51.925,25.44 h0.51
  text "104" at 71.862,24.986 h0.51
  text "104" at 57.475,24.625 h0.51
  text "0R" at 47.676,24.105 h0.64
  text "1M" at 52.675,22.34 h0.51 r90
  text "27R" at 75.8,21.425 h0.51 r90
  text ">" at 56.85,20.825 h0.51 r90
  text ">" at 58.25,20.825 h0.51 r90
  text "0R" at 47.676,20.803 h0.64
  text "12P" at 52.025,19.615 h0.51
  text "1.5K" at 71.075,19.55 h0.51 r90
  text "E24" at 47.76,17.729 h0.86 r90
  text "RTC" at 54.915,16.612 h0.86 r90
  text "104" at 74.325,16.3 h0.51 r90
  text "E25" at 47.752,15.172 h0.86 r90
  text "470R" at 73.65,14.6 h0.51 r90
  text "10K" at 37.414,14.554 h0.64 r90
  text "C18" at 32.741,14.3 h0.64
  text "GND" at 54.915,14.021 h0.86 r90
  text "C3" at 17.856,13.691 h0.86
  text "0R" at 40.208,13.31 h0.51
  text "0R" at 41.3,13.31 h0.51
  text "C19" at 32.741,13.039 h0.64
  text "GND" at 47.753,12.614 h0.86 r90
  text "27P" at 57.625,12.5 h0.51 r90
  text "27P" at 72.875,12.5 h0.51 r90
  text "6MHZ" at 64.275,12.25 h0.76
  text "GND" at 23.647,12.192 h0.64 r90
  text "C15" at 32.741,11.778 h0.64
  text "C12" at 32.741,10.516 h0.64
  text "5V" at 47.752,10.058 h0.86 r90
  text "C14" at 17.755,9.398 h0.86
  text "D8" at 20.625,7.874 h0.86
  text "D10" at 23.135,7.873 h0.86
  text "D12" at 25.646,7.867 h0.86
  text "D14" at 28.156,7.867 h0.86
  text "E6" at 30.666,7.874 h0.86
  text "E8" at 33.177,7.874 h0.86
  text "E10" at 35.687,7.874 h0.86
  text "ADC" at 42.139,7.874 h0.86
  text "ADC" at 44.688,7.874 h0.86
  text "ADC" at 47.238,7.874 h0.86
  text "ADC" at 49.787,7.874 h0.86
  text "ADC" at 52.337,7.874 h0.86
  text "ADC" at 54.887,7.874 h0.86
  text "DAC" at 57.436,7.874 h0.86
  text "E25" at 59.986,7.875 h0.86
  text "E26" at 62.535,7.874 h0.86
  text "E28" at 65.085,7.874 h0.86
  text "WUT 1.3" at 1.575,7.8 h1.27 r270
  text "+" at 39.929,7.061 h0.86 r90
  text "E0" at 5.74,6.949 h0.86
  text "GND" at 8.532,6.96 h0.76 r90
  text "3V3" at 10.725,6.96 h0.86 r90
  text "E3" at 11.22,6.948 h0.86
  text "E5" at 13.411,6.95 h0.86
  text "E1" at 6.836,6.943 h0.86
  text "E2" at 9.028,6.943 h0.86
  text "E4" at 12.315,6.943 h0.86
  text "D7" at 20.625,6.648 h0.86
  text "D9" at 23.135,6.655 h0.86
  text "D11" at 25.646,6.648 h0.86
  text "D13" at 28.156,6.653 h0.86
  text "D15" at 30.666,6.656 h0.86
  text "E7" at 33.177,6.648 h0.86
  text "E9" at 35.687,6.655 h0.86
  text "ADC" at 42.139,6.655 h0.86
  text "ADC" at 44.687,6.655 h0.86
  text "ADC" at 47.236,6.655 h0.86
  text "ADC" at 49.784,6.655 h0.86
  text "ADC" at 52.332,6.655 h0.86
  text "ADC" at 54.881,6.655 h0.86
  text "DAC" at 57.429,6.655 h0.86
  text "E24" at 59.978,6.648 h0.86
  text "GND" at 62.526,6.655 h0.86
  text "E27" at 65.075,6.648 h0.86
  text "E12" at 40.894,4.496 h0.86 r90
  text "E11" at 40.89,2.057 h0.86 r90
Bottom Overlay:
  drawing of 8439 lines, arcs and shapes, not listed
  text "1k" at 36.025,51.725 h0.76 r270
  text "104" at 59.275,49.9 h0.51 r270
  text "10K" at 59.25,48.575 h0.51 r270
  text "C" at 12.217,45.822 h1.02
  text "10K" at 15.977,40.869 h0.86 r90
  text "NPN" at 10.795,38.786 h1.02
  text "1K" at 14.275,36.601 h0.86
  text "10K" at 12.573,30.734 h0.51
  text "1K" at 65.583,28.702 h0.86
  text "104" at 18.449,27.353 h0.51 r90
  text "104" at 36.855,24.943 h0.64 r90
  text "0R" at 42.443,24.892 h0.64 r90
  text "104" at 18.449,23.975 h0.51 r90
  text "用户手册" at 23.597,22.454 h0.76 r300
  text "33nF" at 72.3,21.875 h0.76
  text "c" at 78.511,21.717 h0.86
  text "FB" at 39.345,20.904 h0.64
  text "10K" at 7.075,20.775 h0.51 r270
  text "104" at 11.35,20.6 h0.51
  text "100R" at 20.98,20.549 h0.51 r90
  text "104" at 64.15,20.2 h0.76
  text "10K" at 11.354,19.228 h0.51
  text "2.2K" at 79.15,17.95 h0.51 r90
  text "2K" at 57.8,17.075 h0.76
  text "10K" at 76.2,13.9 h0.51 r270
  text "1R" at 28.499,12.268 h0.64 r90
  text "500R" at 41.631,9.677 h0.64 r90
  text "104" at 9.65,7 h0.51
Mechanical 1:
  lines w0.102: 32.2,23.825 45.2,23.825 ; 38.7,17.3 38.7,30.3